# Altium PCB 27进制2.0.PcbDoc
Units mm, origin at the board's own origin, x right, y up, seen from the top; angles counter-clockwise.
Board outline 152.4 x 101.6 mm, 2 copper layers (Top Layer, Bottom Layer); 19 components, 34 nets, 126 pads, 59 vias.
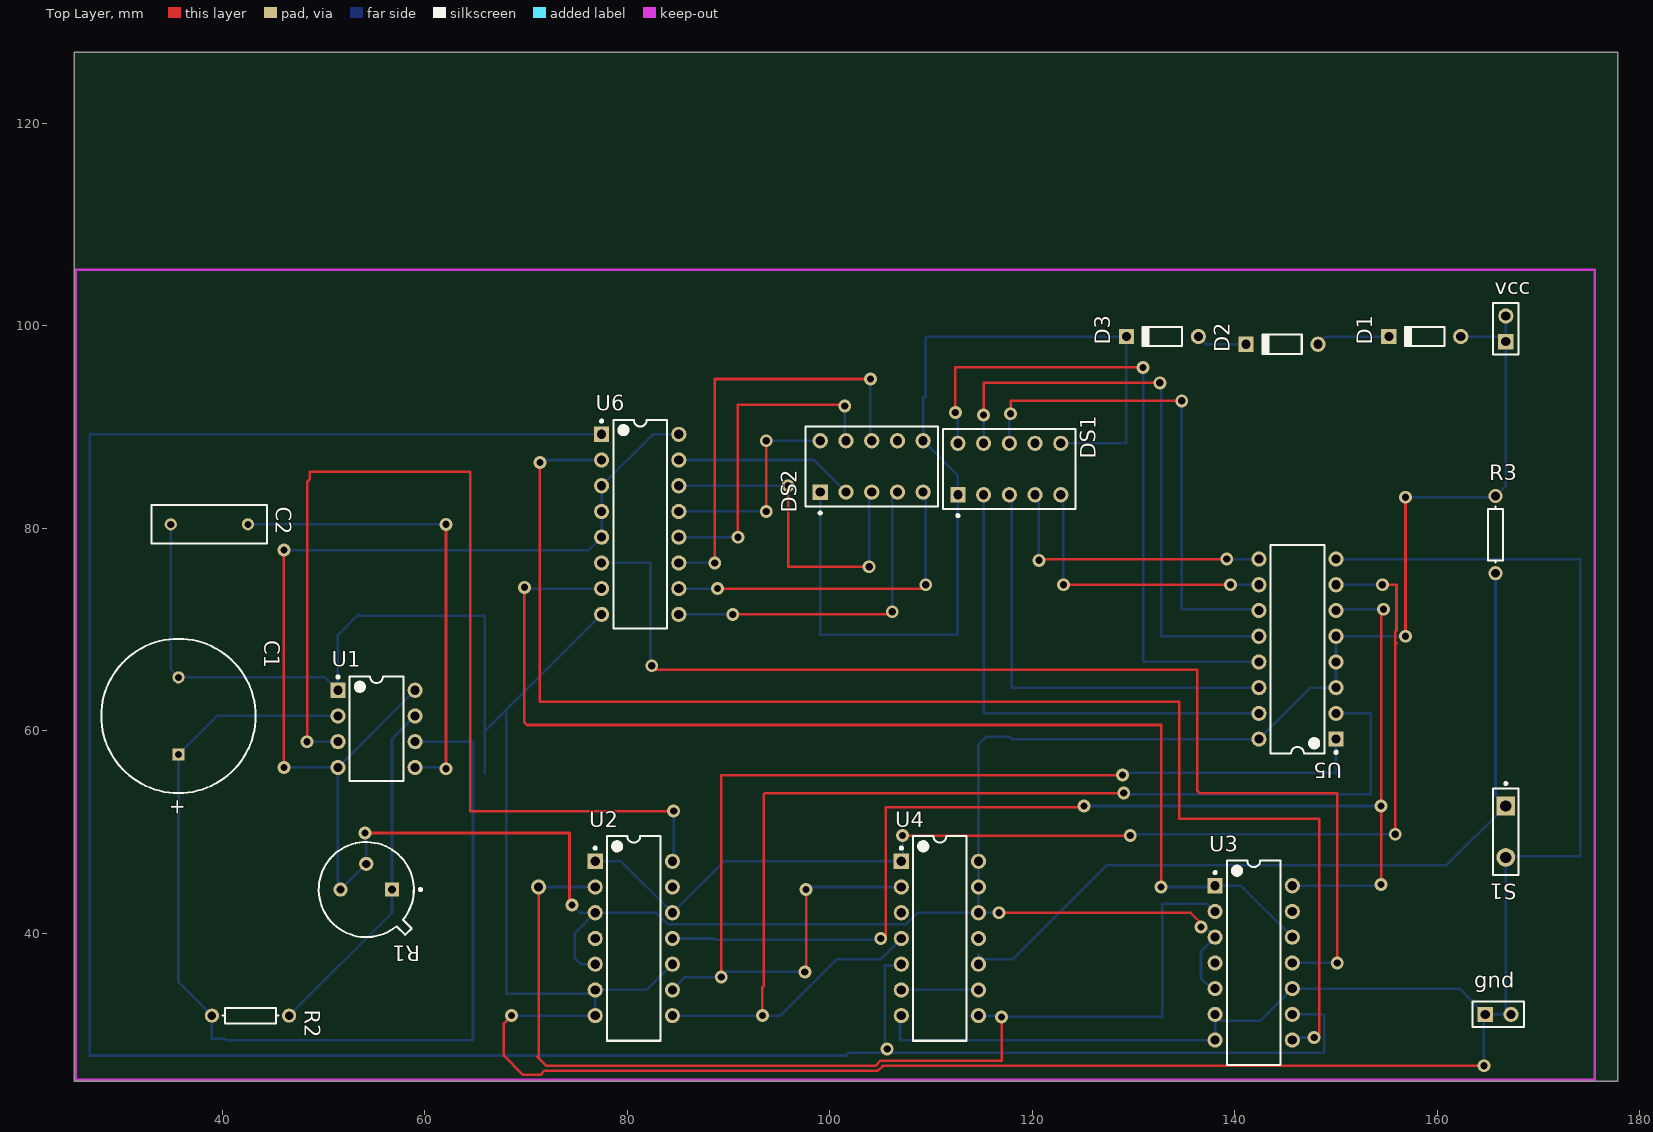
[diagram p0: Top Layer view]
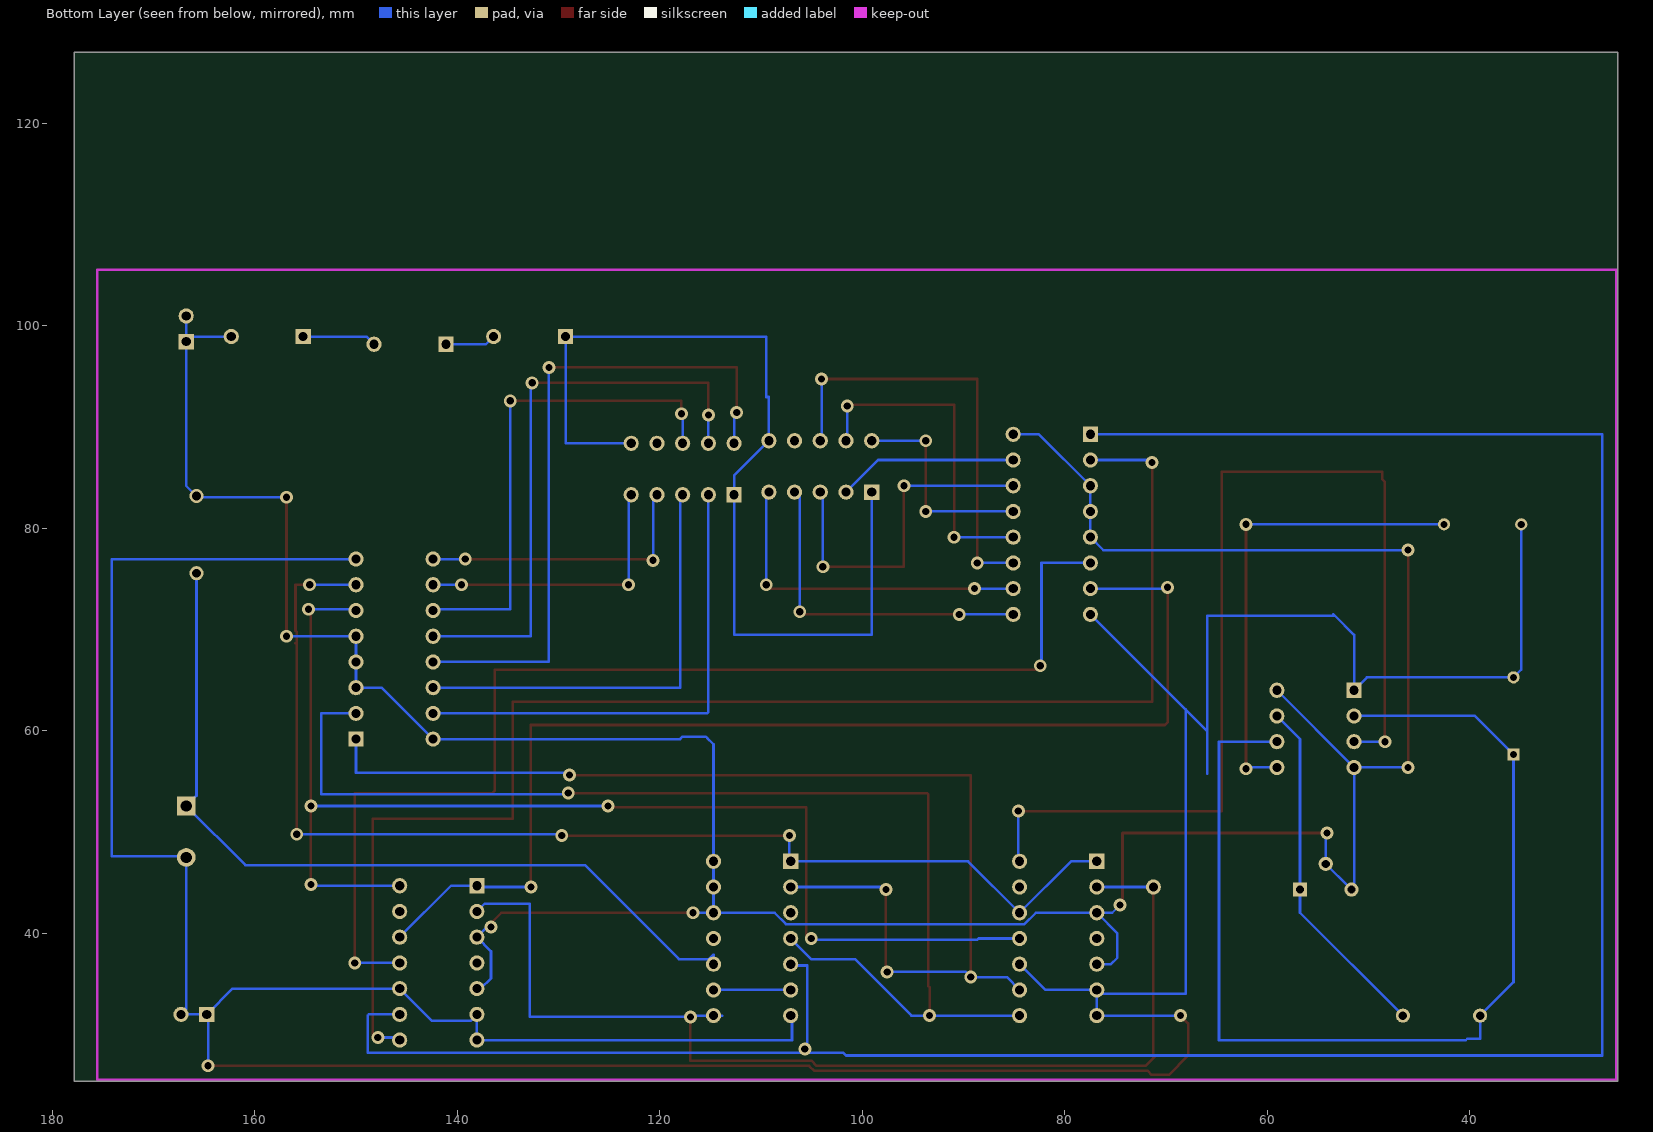
[diagram p1: Bottom Layer view, seen from below]

## Layer stack, top to bottom
Top Layer: signal copper 0.0356
Dielectric: dielectric 0.32, FR-4, Dk 4.8
Bottom Layer: signal copper 0.0356

## Board outline
25.4,25.4 177.8,25.4 177.8,127 25.4,127

## Design rules (kind name [scope] priority, off if disabled: settings)
Clearance [All] p1: gap=0.254
PolygonConnect [All] p1: connectstyle=Relief reliefconductorwidth=0.254 reliefentries=4 polygonreliefangle="90 Angle"
RoutingVias [All] p1: holewidth=0.711 width=1.27 viastyle="Through Hole" minholewidth=0.711 minwidth=1.27 maxholewidth=0.711 maxwidth=1.27
SilkscreenOverComponentPads [All] p1: minsilkscreentomaskgap=0.254
SolderMaskExpansion [All] p1: expansion=0.102
Width [All] p1: maxlimit=0.254 minlimit=0.254 preferedwidth=0.254
27 further rules are at their usual default settings.

## Components (designator, comment, footprint, x,y, rotation, side; value= is the part's Value field where it differs from the comment)
C1 "Cap Pol1" RB7.6-15 35.687,61.468 r270 top
C2 "Cap" RAD-0.3 38.735,80.391 r0 top
D1 "Diode 1N914" DO-35 158.75,98.933 r180 top
D2 "Diode 1N914" DO-35 144.653,98.171 r180 top
D3 "Diode 1N914" DO-35 132.842,98.933 r180 top
DS1 "Dpy Red-CA" A 117.729,85.852 r90 top
DS2 "Dpy Red-CA" A 104.14,86.106 r90 top
gnd "SIP2" HDR1X2 164.719,32.004 r0 top
R1 "Res Tap" TO-39 54.229,44.323 r180 top
R2 "Res1" AXIAL-0.3 42.799,31.877 r0 top
R3 "Res1" AXIAL-0.3 165.735,79.375 r90 top
S1 "SW-PB" SPST-2 166.751,50.038 r270 top
U1 "555_timer" DIP-8 55.245,60.198 r0 top
U2 "74LS90" DIP-14 80.645,39.497 r0 top
U3 "74LS90" DIP-14 141.859,37.084 r0 top
U4 "74LS20" DIP-14 110.871,39.497 r0 top
U5 "74LS47" DIP-16 146.177,68.072 r180 top
U6 "74LS47" DIP-16 81.28,80.391 r0 top
vcc "SIP2" HDR1X2 166.751,98.425 r90 top

## Footprints (in the part's own frame and the unit in brackets; to place one, negate y for a bottom-side part, rotate by r counter-clockwise, add the part's x,y. Pads: shape width x height; smd on the part's side, far side on the other; paste and mask are expansions set on the pad)
A [mm] "LED, 7-Segment Display, 7.62 mm, RHD; 10 Leads; Row Space 5.08 mm; Pitch 2."
  rect 1.5x1.5 hole 0.9: 1(-2.54,5.08)
  round 1.5 hole 0.9: 2(-2.54,2.54) 3(-2.54,0) 4(-2.54,-2.54) 5(-2.54,-5.08) 6(2.54,-5.08) 7(2.54,-2.54) 8(2.54,0) 9(2.54,2.54) 10(2.54,5.08)
  silkscreen extent -4.72,-6.55 3.95,6.55, body extent -3.95,-6.55 3.95,6.55, height 6.34
AXIAL-0.3 [mm] "Axial Device, Thru-Hole; 2 Leads; 0.3 in Pin Spa"
  round 1.4 hole 0.85: 1(-3.81,0) 2(3.81,0)
  silkscreen extent -2.77,-0.76 2.77,0.76
DIP-8 [mm] "DIP; 8 Leads; Row Spacing 7.62 mm; P"
  rect 1.5x1.5 hole 0.9: 1(-3.81,3.81)
  round 1.5 hole 0.9: 2(-3.81,1.27) 3(-3.81,-1.27) 4(-3.81,-3.81) 5(3.81,-3.81) 6(3.81,-1.27) 7(3.81,1.27) 8(3.81,3.81)
  silkscreen extent -3.93,-5.15 2.65,5.23, body extent -3.6,-5.15 3.6,5.15, height 5.08
DIP-14 [mm] "DIP; 14 Leads; Row Spacing 7.62 mm; P"
  rect 1.5x1.5 hole 0.9: 1(-3.81,7.62)
  round 1.5 hole 0.9: 2(-3.81,5.08) 3(-3.81,2.54) 4(-3.81,0) 5(-3.81,-2.54) 6(-3.81,-5.08) 7(-3.81,-7.62) 8(3.81,-7.62) 9(3.81,-5.08) 10(3.81,-2.54) 11(3.81,0) 12(3.81,2.54) 13(3.81,5.08) 14(3.81,7.62)
  silkscreen extent -3.93,-10.1 2.65,10.1, body extent -3.6,-10.1 3.6,10.1, height 5.08
DIP-16 [mm] "DIP; 16 Leads; Row Spacing 7.62 mm; P"
  rect 1.5x1.5 hole 0.9: 1(-3.81,8.89)
  round 1.5 hole 0.9: 2(-3.81,6.35) 3(-3.81,3.81) 4(-3.81,1.27) 5(-3.81,-1.27) 6(-3.81,-3.81) 7(-3.81,-6.35) 8(-3.81,-8.89) 9(3.81,-8.89) 10(3.81,-6.35) 11(3.81,-3.81) 12(3.81,-1.27) 13(3.81,1.27) 14(3.81,3.81) 15(3.81,6.35) 16(3.81,8.89)
  silkscreen extent -3.94,-10.3 2.65,10.31, body extent -3.6,-10.28 3.6,10.28, height 5.08
DO-35 [mm] "Diode, Axial; Body 3.8 x 1.9 mm (LxDia. max), Lead Dia. 0.53 mm ("
  round 1.5 hole 0.9: 1(-3.55,0)
  rect 1.5x1.5 hole 0.9: 2(3.55,0)
  silkscreen extent -1.95,-0.95 2.05,0.95
HDR1X2 [mm] "Connector; Header"
  rect 1.5x1.5 hole 0.9: 1(0,0)
  round 1.5 hole 0.9: 2(2.54,0)
  silkscreen extent -1.27,-1.27 3.81,1.27
RAD-0.3 [mm] "Radial Cap, Thru-Hole; 2 Leads; 0.3 in Pin Spa"
  round 1.2 hole 0.7: 1(-3.81,0) 2(3.81,0)
  silkscreen extent -5.71,-1.91 5.71,1.91
RB7.6-15 [mm] "Polarized Capacitor (Radial); 2 L"
  rect 1.2x1.2 hole 0.7: 1(3.81,0)
  round 1.2 hole 0.7: 2(-3.81,0)
  silkscreen extent -7.62,-7.62 7.62,7.62
SPST-2 [mm] "Switch; 2 L"
  rect 1.85x1.85 hole 1.1: 1(-2.54,0)
  round 1.85 hole 1.1: 2(2.54,0)
  silkscreen extent -4.89,-1.27 4.28,1.27
TO-39 [mm] "Can; 3 Leads; Pin Circle Dia. 5.08 mm; Lead Dia. 0.48 mm ("
  rect 1.4x1.4 hole 0.8: 1(-2.54,0)
  round 1.4 hole 0.8: 2(0,-2.54) 3(2.54,0)
  silkscreen extent -5.48,-4.69 4.69,4.69, body extent -4.7,-4.7 4.7,4.7, height 4.55

## Part data
C1: "Polarized Capacitor (Radial)"
C2: "Capacitor"
D1 D2 D3: "High Conductance Fast Diode"
DS1 DS2: "7.62 mm Black Surface HER 7-Segment Display: CA, RH DP"
gnd vcc: "jointbar"
R1: "Tapped Resistor"
R2 R3: "Resistor"
S1: "Switch"

## Free pads (board coordinates)
  round 1.5 hole 0.9: 0(71.247,44.577)

## Via types
v1: diameter 1.27, hole 0.711, Top Layer to Bottom Layer, 59 vias

## Nets (pads, with @x,y where several pads share a name; then routed paths per layer and width w, separated by ;. In a path a pad name is that pad's centre, name@x,y a point inside that pad or via, vN(x,y) a via of type N, cw(c..) or ccw(c..) an arc to the next point about the centre after c; other vN are vias at no path point)
A1: DS1.10 U5.13 | length 66.7
  Top Layer w0.254: v1(112.395,91.44) 112.395,95.885 v1(130.937,95.885)
  Bottom Layer w0.254: DS1.10 v1@112.649,91.567 ; v1(130.937,95.885) 130.937,66.802 U5.13
B1: DS1.9 U5.12 | length 57.9
  Top Layer w0.254: v1(115.189,91.186) 115.189,94.361 v1(132.588,94.361)
  Bottom Layer w0.254: DS1.9 v1(115.189,91.186) ; v1@132.715,94.234 132.715,69.342 U5.12
C1: DS1.8 U5.11 | length 49.4
  Top Layer w0.254: v1(117.856,91.313) 117.856,92.583 v1(134.747,92.583)
  Bottom Layer w0.254: DS1.8 v1@117.729,91.567 ; v1(134.747,92.583) 134.747,72.009 U5.11@142.24,72.009
C2: DS2.8 U6.11 | length 43.1
  Top Layer w0.254: v1(88.646,76.581) 88.646,94.742 v1(104.013,94.742)
  Bottom Layer w0.254: U6.11 v1(88.646,76.581) ; DS2.8@104.013,88.773 v1(104.013,94.742)
D1: DS1.5 U5.10 | length 28.3
  Top Layer w0.254: v1(123.063,74.422) v1(139.573,74.422)
  Bottom Layer w0.254: DS1.5 123.063,83.058 v1(123.063,74.422) ; v1(139.573,74.422) U5.10
D2: DS2.5 U6.10 | length 33.3
  Top Layer w0.254: v1(88.9,74.041) v1@109.474,74.041
  Bottom Layer w0.254: U6.10 v1(88.9,74.041) ; v1(109.474,74.422) DS2.5@109.474,83.312
E1: DS1.4 U5.9 | length 28.5
  Top Layer w0.254: v1@120.523,76.962 v1(139.192,76.962)
  Bottom Layer w0.254: DS1.4 120.65,82.931 v1(120.65,76.835) ; v1(139.192,76.962) U5.9
E2: DS2.4 U6.9 | length 33.2
  Top Layer w0.254: v1(90.424,71.501) v1@106.299,71.501
  Bottom Layer w0.254: U6.9 v1(90.424,71.501) ; v1(106.172,71.755) 106.172,83.058 DS2.4
F1: DS1.2 U5.15 | length 48.7
  Bottom Layer w0.254: DS1.2 115.189,61.849 115.316,61.722 U5.15
G1: DS1.3 U5.14 | length 43.5
  Bottom Layer w0.254: DS1.3 117.983,83.058 117.983,64.262 U5.14
GND: C1.2 C2.1 gnd.1 gnd.2 S1.2 U1.1 U2.6 U2.7 U2.10 U3.6 U3.7 U3.10 U4.7 U5.8 U6.8 | length 393.3
  Top Layer w0.254: v1(68.58,31.877) 67.818,31.115 67.818,27.94 69.723,26.035 71.418,26.035 71.799,26.416 104.731,26.416 105.239,26.924 v1(164.592,26.924)
  Bottom Layer w0.254: C2.1 34.925,66.04 C1.2 50.165,65.278 U1.1 51.435,69.469 53.34,71.374 ; 53.467,71.501 53.34,71.374 ; 65.913,55.753 65.913,59.944 ; v1(68.58,31.877) U2.7 U2.6 ; U6.8 68.072,62.103 ; U2.10 81.915,34.417 U2.6 ; U4.7 106.934,31.75 106.934,29.464 U3.7 ; U3.7@137.668,29.083 U3.7 ; U5.8 174.117,76.962 174.117,47.625 S1.2@166.878,47.625 ; v1(164.592,26.924) 164.592,31.877 gnd.1 ; S1.2 166.751,32.512 gnd.2 gnd.1 ; 53.34,71.374 65.913,71.374 65.913,59.944 ; 65.913,59.944 68.072,62.103 ; 68.072,62.103 68.072,34.036 76.454,34.036 U2.6 ; U3.7 U3.6 138.684,31.369 142.494,31.369 U3.10 162.179,34.544 gnd.1
NetC1_1: C1.1 R2.1 U1.2 U1.6 | length 107.6
  Bottom Layer w0.254: 40.259,29.591 38.989,29.591 R2.1 35.687,35.179 C1.1 39.497,61.468 U1.2 ; 40.386,29.464 64.77,29.464 64.77,58.928 U1.6
NetC2_2: C2.2 U1.5 | length 46.6
  Top Layer w0.254: v1(62.103,56.261) v1(62.103,80.391)
  Bottom Layer w0.254: C2.2 v1(62.103,80.391) ; U1.5 v1@61.976,56.388
NetD1_2: D1.2 D2.1 | length 7.3
  Bottom Layer w0.254: D2.1 148.965,98.933 D1.2
NetD2_2: D2.2 D3.1 | length 5
  Bottom Layer w0.254: D3.1 137.154,98.171 D2.2
NetDS2_2: DS2.2 U6.15 | length 17.8
  Bottom Layer w0.254: U6.15 98.425,86.741 DS2.2
NetDS2_3: DS2.3 U6.14 | length 33.9
  Top Layer w0.254: v1(95.885,84.201) 95.885,76.2 v1(103.886,76.2)
  Bottom Layer w0.254: U6.14 v1(95.885,84.201) ; v1(103.886,76.2) DS2.3@103.886,83.312
NetDS2_9: DS2.9 U6.12 | length 32.9
  Top Layer w0.254: v1(90.932,79.121) 90.932,92.202 v1@101.6,92.202
  Bottom Layer w0.254: U6.12 v1(90.932,79.121) ; DS2.9@101.473,88.773 v1(101.473,92.075)
NetDS2_10: DS2.10 U6.13 | length 21.3
  Top Layer w0.254: v1(93.726,81.661) v1(93.726,88.646)
  Bottom Layer w0.254: U6.13@85.344,81.915 U6.13 v1(93.726,81.661) ; v1(93.726,88.646) DS2.10
NetR1_1: R1.1 R2.2 U1.7 | length 34.7
  Bottom Layer w0.254: R2.2 56.769,42.037 R1.1 56.769,59.182 U1.7
NetR3_1: R3.1 S1.1 U4.10 | length 82.9
  Bottom Layer w0.254: U4.10 114.681,37.898 115.114,37.465 118.11,37.465 127.381,46.736 160.909,46.736 S1.1 165.735,53.594 R3.1
NetU1_3: U1.3 U2.14 | length 104.1
  Top Layer w0.254: v1(48.387,58.928) 48.387,84.582 48.641,84.836 48.641,85.598 64.516,85.598 64.516,52.07 v1(84.582,52.07)
  Bottom Layer w0.254: v1(48.387,58.928) U1.3 ; U2.14@84.582,47.244 v1(84.582,52.07)
NetU2_1: U2.1 U2.12 U4.1 U5.7 | length 116.2
  Top Layer w0.254: v1(107.188,49.657) v1(129.667,49.657) ; v1(154.559,74.422) 155.956,74.422 155.956,69.89 155.829,69.763 155.829,68.794 ; v1(155.829,49.784) 155.829,68.794 ; 155.956,68.667 155.829,68.794
  Bottom Layer w0.254: U2.1 79.375,47.117 U2.12 89.535,47.117 U4.1 ; U4.1@107.188,47.244 v1(107.188,49.657) ; v1@129.794,49.784 v1(155.829,49.784) ; U5.7 v1(154.559,74.422)
NetU2_2: pad.0 U2.2 U3.2 U4.8 | length 108.6
  Top Layer w0.254: 71.12,27.813 71.247,27.686 ; pad.0@71.247,44.196 71.247,27.686 ; v1(116.967,31.75) 116.967,27.432 105.029,27.432 104.521,26.924 72.009,26.924 71.247,27.686
  Bottom Layer w0.254: pad.0 U2.2 ; 113.8,31.877 U4.8 v1@116.967,31.877 ; v1(116.967,31.75) 132.842,31.75 132.842,42.926 137.287,42.926 U3.2
NetU2_8: U2.8 U4.4 U5.2 | length 118.5
  Top Layer w0.254: v1(93.345,31.877) 93.345,34.671 ; 93.472,34.798 93.472,53.721 ; 93.599,53.848 v1(129.032,53.848)
  Bottom Layer w0.254: U2.8 v1(93.345,31.877) 95.135,31.877 100.683,37.425 104.989,37.425 U4.4 ; v1@129.286,53.721 153.416,53.721 153.416,61.722 U5.2
NetU2_9: U2.9 U4.2 U5.1 | length 114.3
  Top Layer w0.254: v1(89.281,35.687) 89.281,55.626 v1(128.905,55.626) ; v1@97.663,36.322 v1(97.663,44.323)
  Bottom Layer w0.254: U2.9 85.725,35.687 v1(89.281,35.687) ; 89.789,36.195 v1(97.536,36.195) ; v1@97.79,44.577 U4.2 ; v1@128.905,55.88 149.987,55.88 U5.1
NetU2_11: U2.11 U3.14 U5.6 | length 122.3
  Top Layer w0.254: v1@105.537,39.751 105.537,52.451 124.968,52.451 v1(125.095,52.578) ; v1(154.432,44.831) v1@154.432,71.882
  Bottom Layer w0.254: U2.11 88.519,39.497 88.646,39.37 v1@104.902,39.37 ; v1(125.095,52.578) v1(154.432,52.578) ; U3.14 v1@154.178,44.704 ; U5.6@150.114,72.009 v1(154.686,72.009)
  other v1: 105.029,39.497
NetU3_1: U3.1 U3.12 U6.7 | length 114.9
  Top Layer w0.254: v1(69.85,74.168) 69.85,60.833 70.104,60.579 132.715,60.579 v1(132.715,44.577)
  Bottom Layer w0.254: v1@69.977,74.041 U6.7 ; v1(132.715,44.577) 137.922,44.577 U3.1 140.589,44.704 U3.12
NetU3_9: U3.9 U4.5 U6.1 | length 250.9
  Bottom Layer w0.254: U6.1 26.924,89.281 26.924,27.94 101.6,27.94 101.854,28.194 148.844,28.194 148.844,31.877 148.717,32.004 U3.9 ; v1(105.664,28.575) 105.41,28.829 105.41,36.83 106.934,36.83 U4.5
NetU4_6: U4.6 U4.9 | length 7.6
  Bottom Layer w0.254: U4.6 U4.9
Q2: U3.8 U6.2 | length 142.1
  Top Layer w0.254: v1(71.374,86.487) 71.374,62.865 134.493,62.865 134.493,51.308 148.336,51.308 148.336,29.845 v1@148.209,29.718
  Bottom Layer w0.254: v1@71.374,86.741 U6.2 ; U3.8 145.923,29.718 v1(147.828,29.718)
Q3: U3.11 U6.6 | length 115.5
  Top Layer w0.254: v1@82.677,66.04 136.271,66.04 136.271,54.102 136.525,53.848 150.114,53.848 v1(150.114,37.084)
  Bottom Layer w0.254: U6.6 82.296,76.581 v1@82.296,66.548 ; U3.11 v1(150.114,37.084)
  other v1: 82.423,66.421
VCC: D1.1 R1.2 R1.3 R3.2 U1.4 U1.8 U2.3 U2.5 U3.3 U3.5 U4.12 U4.13 U4.14 U5.3 U5.4 U5.5 U5.16 U6.3 U6.4 U6.5 U6.16 vcc.1 vcc.2 | length 320.3
  Top Layer w0.254: v1(46.101,56.388) v1(46.101,77.851) ; v1(54.102,49.911) 74.295,49.911 v1@74.295,42.799 ; v1(116.713,42.037) 135.636,42.037 v1@137.16,40.513 ; v1(156.845,69.342) v1(156.845,83.058)
  Bottom Layer w0.254: v1(46.101,56.388) U1.4 ; v1(46.101,77.851) 76.2,77.851 U6.5 U6.4 U6.3 82.55,89.281 U6.16 ; v1@54.229,49.403 R1.2 51.943,44.577 51.435,44.577 U1.4 ; U1.8 U1.4 ; v1(74.549,42.799) 75.311,42.037 U2.3 ; U2.5 75.438,36.957 74.803,37.592 74.803,40.005 U2.3 ; 115.316,59.309 114.681,58.674 U4.14 U4.13 U4.12 ; 115.443,59.436 117.729,59.436 117.983,59.182 U5.16 ; v1(116.713,42.037) U4.12 ; v1@137.16,40.513 U3.3 136.652,38.227 136.652,35.56 U3.5@137.668,34.544 ; U5.16@142.24,59.055 U5.16 ; v1(156.845,69.342) U5.5 U5.4 U5.3 147.447,64.262 U5.16 ; v1(156.845,83.058) 165.608,83.058 R3.2 166.751,84.201 vcc.1 vcc.2 ; D1.1 vcc.1@166.243,98.933 ; U2.3 82.856,42.037 83.987,40.906 107.529,40.906 108.66,42.037 U4.12
  other v1: 136.652,40.64
VDD: D3.2 DS1.1 DS1.6 DS2.1 DS2.6 | length 95.7
  Bottom Layer w0.254: DS2.1 99.06,69.469 112.649,69.469 DS1.1 112.649,85.217 DS2.6 109.22,92.964 109.474,92.964 109.474,98.933 D3.2 129.292,88.392 DS1.6
pads on no net: DS1.7 DS2.7 U2.4 U2.13 U3.4 U3.13 U4.3 U4.11

## Keep-outs
Keep-Out Layer:
  lines w0.254: 165.735,105.527 175.504,105.527 ; 165.979,105.527 25.527,105.527 25.527,25.527 175.527,25.527 175.527,105.296 175.527,105.504

## Text inside footprints (layer, text, board x,y; h text height)
C1: Top Overlay "+" at 34.95,53.336 h1.5 r270